# Altium PCB Main.PcbDoc (part 2 of 4)
Units mil, origin at the board's own origin, x right, y up, seen from the top; angles counter-clockwise.
Board outline 16000 x 4900 mil, 4 copper layers (L1-Top, L2-Mid-A, L3-Mid-B, L4-Bottom), stack 285.556 mil thick; 96 components, 105 nets, 278 pads, 8355 vias.
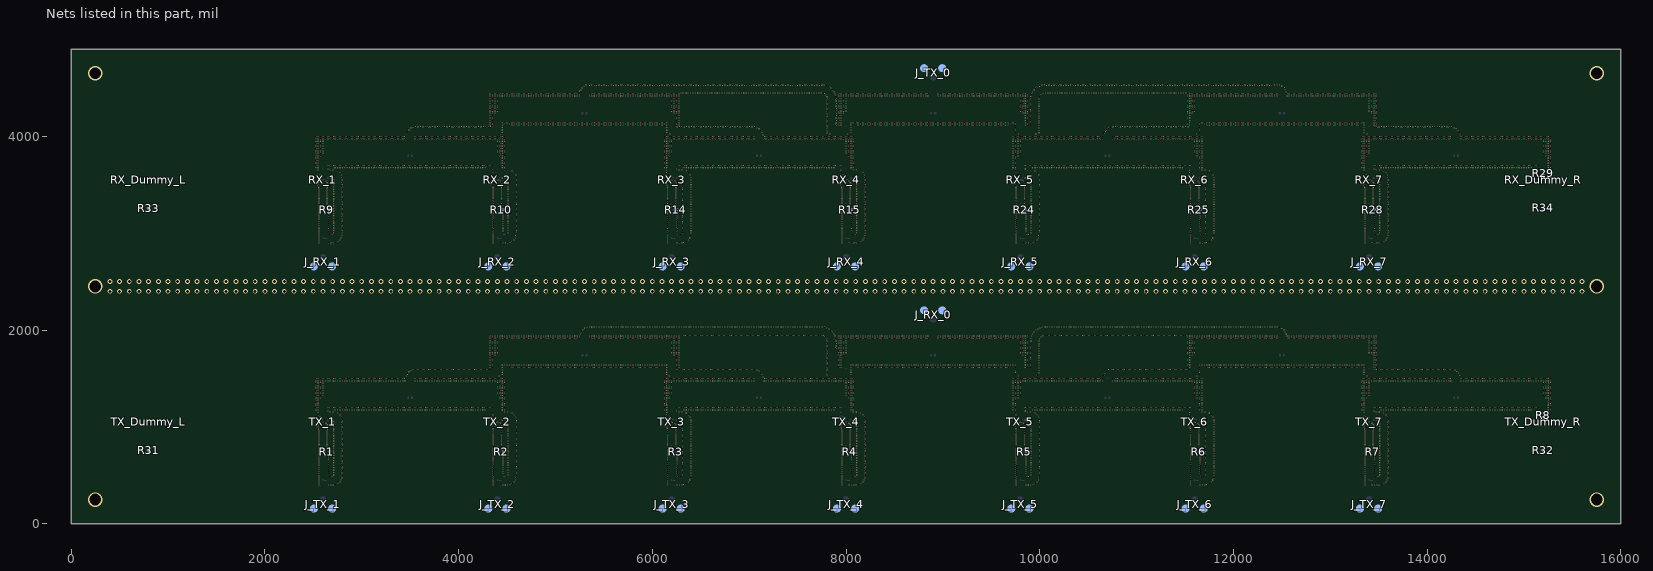
[diagram p4: the nets of this part, all layers, seen from the top]

## Via types
v1: diameter 12, hole 6, L3-Mid-B to L4-Bottom, tented both sides, 5944 vias
v2: diameter 12, hole 6, L3-Mid-B to L4-Bottom, tented bottom, 2081 vias
v3: diameter 50, hole 31, L1-Top to L4-Bottom, tented both sides, 306 vias
v4: diameter 39.37/55.12/55.12 (per signal layer), hole 35.43, L2-Mid-A to L4-Bottom, 18 vias
v5: diameter 150, hole 120, L1-Top to L4-Bottom, 6 vias

## Nets (pads, with @x,y where several pads share a name; then routed paths per layer and width w, separated by ;. In a path a pad name is that pad's centre, name@x,y a point inside that pad or via, vN(x,y) a via of type N, cw(c..) or ccw(c..) an arc to the next point about the centre after c; other vN are vias at no path point) (continued)
GND: (continued)
  other v1: 2558,400 4358,400 6158,400 7958,400 9758,400 11558,400 13358,400 2558,420 4358,420 6158,420 7958,420 9758,420 11558,420 13358,420 2558,440 4358,440 6158,440 7958,440 9758,440 11558,440 13358,440 2558,460 4358,460 6158,460 7958,460 9758,460 11558,460 13358,460 2558,480 4358,480 6158,480 7958,480 9758,480 11558,480 13358,480 2558,500 4358,500 6158,500 7958,500 9758,500 11558,500 13358,500 2558,520 2657.76,520 4358,520 4457.76,520 6158,520 6257.76,520 7958,520 8057.76,520 9758,520 9857.76,520 11558,520 11657.76,520 13358,520 13457.76,520 2558,540 2657.76,540 4358,540 4457.76,540 6158,540 6257.76,540 7958,540 8057.76,540 9758,540 9857.76,540 11558,540 11657.76,540 13358,540 13457.76,540 2558,560 2657.76,560 4358,560 4457.76,560 6158,560 6257.76,560 7958,560 8057.76,560 9758,560 9857.76,560 11558,560 11657.76,560 13358,560 13457.76,560 2558,580 2657.76,580 4358,580 4457.76,580 6158,580 6257.76,580 7958,580 8057.76,580 9758,580 9857.76,580 11558,580 11657.76,580 13358,580 13457.76,580 2558,600 2657.76,600 4358,600 4457.76,600 6158,600 6257.76,600 7958,600 8057.76,600 9758,600 9857.76,600 11558,600 11657.76,600 13358,600 13457.76,600 2558,620 2657.76,620 4358,620 4457.76,620 6158,620 6257.76,620 7958,620 8057.76,620 9758,620 9857.76,620 11558,620 11657.76,620 13358,620 13457.76,620 2558,640 2657.76,640 4358,640 4457.76,640 6158,640 6257.76,640 7958,640 8057.76,640 9758,640 9857.76,640 11558,640 11657.76,640 13358,640 13457.76,640 2558,660 2657.76,660 4358,660 4457.76,660 6158,660 6257.76,660 7958,660 8057.76,660 9758,660 9857.76,660 11558,660 11657.76,660 13358,660 13457.76,660 2558,680 2657.76,680 4358,680 4457.76,680 6158,680 6257.76,680 7958,680 8057.76,680 9758,680 9857.76,680 11558,680 11657.76,680 13358,680 13457.76,680 2558,700 2657.76,700 4358,700 4457.76,700 6158,700 6257.76,700 7958,700 8057.76,700 9758,700 9857.76,700 11558,700 11657.76,700 13358,700 13457.76,700 2558,720 2657.76,720 4358,720 4457.76,720 6158,720 6257.76,720 7958,720 8057.76,720 9758,720 9857.76,720 11558,720 11657.76,720 13358,720 13457.76,720 2558,740 4358,740 6158,740 7958,740 9758,740 11558,740 13358,740 2660.28,742.2 4460.27,742.2 6260.27,742.2 8060.27,742.2 9860.27,742.2 11660.27,742.2 13460.27,742.2 2558,760 4358,760 6158,760 7958,760 9758,760 11558,760 13358,760 2642,775 4442,775 6242,775 8042,775 11642,775 13442,775 2558,780 4358,780 6158,780 7958,780 9758,780 11558,780 13358,780 2642,795 4442,795 6242,795 8042,795 11642,795 13442,795 2558,815 2642,815 4358,815 4442,815 6158,815 6242,815 7958,815 8042,815 9758,815 9842,815 11558,815 11642,815 13358,815 13442,815 2558,835 2642,835 4358,835 4442,835 6158,835 6242,835 7958,835 8042,835 9758,835 9842,835 11558,835 11642,835 13358,835 13442,835 2558,855 2642,855 4358,855 4442,855 6158,855 6242,855 7958,855 8042,855 9758,855 9842,855 11558,855 11642,855 13358,855 13442,855 2558,875 2642,875 4358,875 4442,875 6158,875 6242,875 7958,875 8042,875 9758,875 9842,875 11558,875 11642,875 13358,875 13442,875 2558,895 2642,895 4358,895 4442,895 6158,895 6242,895 7958,895 8042,895 9758,895 9842,895 11558,895 11642,895 13358,895 13442,895 2558,915 2642,915 4358,915 4442,915 6158,915 6242,915 7958,915 8042,915 9758,915 9842,915 11558,915 11642,915 13358,915 13442,915 2558,935 2642,935 4358,935 4442,935 6158,935 6242,935 7958,935 8042,935 9758,935 9842,935 11558,935 11642,935 13358,935 13442,935 2558,955 2642,955 4358,955 4442,955 6158,955 6242,955 7958,955 8042,955 9758,955 9842,955 11558,955 11642,955 13358,955 13442,955 2556.7,975 2643.3,975 4356.7,975 4443.3,975 6156.7,975 6243.3,975 7956.7,975 8043.3,975 9756.7,975 9843.3,975 11556.7,975 11643.3,975 13356.7,975 13443.3,975 2550.76,991.32 2649.24,991.32 4350.76,991.32 4449.24,991.32 6150.76,991.32 6249.24,991.32 7950.76,991.32 8049.24,991.32 9750.76,991.32 9849.24,991.32 11550.76,991.32 11649.24,991.32 13350.76,991.32 13449.24,991.32 2550.76,1008.68 2649.24,1008.68 4350.76,1008.68 4449.24,1008.68 6150.76,1008.68 6249.24,1008.68 7950.76,1008.68 8049.24,1008.68 9750.76,1008.68 9849.24,1008.68 11550.76,1008.68 11649.24,1008.68 13350.76,1008.68 13449.24,1008.68 2556.7,1025 2643.3,1025 4356.7,1025 4443.3,1025 6156.7,1025 6243.3,1025 7956.7,1025 8043.3,1025 9756.7,1025 9843.3,1025 11556.7,1025 11643.3,1025 13356.7,1025 13443.3,1025 2567.86,1038.3 2632.14,1038.3 4367.86,1038.3 4432.14,1038.3 6167.86,1038.3 6232.14,1038.3 7967.86,1038.3 8032.14,1038.3 9767.86,1038.3 9832.14,1038.3 11567.86,1038.3 11632.14,1038.3 13367.86,1038.3 13432.14,1038.3 2582.9,1046.98 2617.1,1046.98 4382.9,1046.98 4417.1,1046.98 6182.9,1046.98 6217.1,1046.98 7982.9,1046.98 8017.1,1046.98 9782.9,1046.98 9817.1,1046.98 11582.9,1046.98 11617.1,1046.98 13382.9,1046.98 13417.1,1046.98 2600,1050 4400,1050 6200,1050 8000,1050 9800,1050 11600,1050 13400,1050 2525,1175 2550,1175 2725,1175 2750,1175 2775,1175 2800,1175 2825,1175 2850,1175 2875,1175 2900,1175 2925,1175 2950,1175 2975,1175 3000,1175 3025,1175 3050,1175 3075,1175 3100,1175 3125,1175 3150,1175 3175,1175 3200,1175 3225,1175 3250,1175 3275,1175 3300,1175 3325,1175 3350,1175 3375,1175 3400,1175 3425,1175 3450,1175 3475,1175 3500,1175 3525,1175 3550,1175 3575,1175 3600,1175 3625,1175 3650,1175 3675,1175 3700,1175 3725,1175 3750,1175 3775,1175 3800,1175 3825,1175 3850,1175 3875,1175 3900,1175 3925,1175 3950,1175 3975,1175 4000,1175 4025,1175 4050,1175 4075,1175 4100,1175 4125,1175 4150,1175 4175,1175 4200,1175 4225,1175 4250,1175 4275,1175 4450,1175 4475,1175 6125,1175 6150,1175 6325,1175 6350,1175 6375,1175 6400,1175 6425,1175 6450,1175 6475,1175 6500,1175 6525,1175 6550,1175 6575,1175 6600,1175 6625,1175 6650,1175 6675,1175 6700,1175 6725,1175 6750,1175 6775,1175 6800,1175 6825,1175 6850,1175 6875,1175 6900,1175 6925,1175 6950,1175 6975,1175 7000,1175 7025,1175 7050,1175 7075,1175 7100,1175 7125,1175 7150,1175 7175,1175 7200,1175 7225,1175 7250,1175 7275,1175 7300,1175 7325,1175 7350,1175 7375,1175 7400,1175 7425,1175 7450,1175 7475,1175 7500,1175 7525,1175 7550,1175 7575,1175 7600,1175 7625,1175 7650,1175 7675,1175 7700,1175 7725,1175 7750,1175 7775,1175 7800,1175 7825,1175 7850,1175 7875,1175 8050,1175 8075,1175 9725,1175 9750,1175 9925,1175 9950,1175 9975,1175 10000,1175 10025,1175 10050,1175 10075,1175 10100,1175 10125,1175 10150,1175 10175,1175 10200,1175 10225,1175 10250,1175 10275,1175 10300,1175 10325,1175 10350,1175 10375,1175 10400,1175 10425,1175 10450,1175 10475,1175 10500,1175 10525,1175 10550,1175 10575,1175 10600,1175 10625,1175 10650,1175 10675,1175 10700,1175 10725,1175 10750,1175 10775,1175 10800,1175 10825,1175 10850,1175 10875,1175 10900,1175 10925,1175 10950,1175 10975,1175 11000,1175 11025,1175 11050,1175 11075,1175 11100,1175 11125,1175 11150,1175 11175,1175 11200,1175 11225,1175 11250,1175 11275,1175 11300,1175 11325,1175 11350,1175 11375,1175 11400,1175 11425,1175 11450,1175 11475,1175 11650,1175 11675,1175 13325,1175 13350,1175 13525,1175 13550,1175 13575,1175 13600,1175 13625,1175 13650,1175 13675,1175 13700,1175 13725,1175 13750,1175 13775,1175 13800,1175 13825,1175 13850,1175 13875,1175 13900,1175 13925,1175 13950,1175 13975,1175 14000,1175 14025,1175 14050,1175 14075,1175 14100,1175 14125,1175 14150,1175 14175,1175 14200,1175 14225,1175 14250,1175 14275,1175 14300,1175 14325,1175 14350,1175 14375,1175 14400,1175 14425,1175 14450,1175 14475,1175 14500,1175 14525,1175 14550,1175 14575,1175 14600,1175 14625,1175 14650,1175 14675,1175 14700,1175 14725,1175 14750,1175 14775,1175 14800,1175 14825,1175 14850,1175 14875,1175 14900,1175 14925,1175 14950,1175 14975,1175 15000,1175 15025,1175 15050,1175 15075,1175 15250,1175 15275,1175 2525,1200 2550,1200 2650,1200 2675,1200 2700,1200 2725,1200 2750,1200 2775,1200 2800,1200 2825,1200 2850,1200 2875,1200 2900,1200 2925,1200 2950,1200 2975,1200 3000,1200 3025,1200 3050,1200 3075,1200 3100,1200 3125,1200 3150,1200 3175,1200 3200,1200 3225,1200 3250,1200 3275,1200 3300,1200 3325,1200 3350,1200 3375,1200 3400,1200 3425,1200 3450,1200 3475,1200 3500,1200 3525,1200 3550,1200 3575,1200 3600,1200 3625,1200 3650,1200 3675,1200 3700,1200 3725,1200 3750,1200 3775,1200 3800,1200 3825,1200 3850,1200 3875,1200 3900,1200 3925,1200 3950,1200 3975,1200 4000,1200 4025,1200 4050,1200 4075,1200 4100,1200 4125,1200 4150,1200 4175,1200 4200,1200 4225,1200 4250,1200 4275,1200 4300,1200 4325,1200 4350,1200 4450,1200 4475,1200 6125,1200 6150,1200 6250,1200 6275,1200 6300,1200 6325,1200 6350,1200 6375,1200 6400,1200 6425,1200 6450,1200 6475,1200 6500,1200 6525,1200 6550,1200 6575,1200 6600,1200 6625,1200 6650,1200 6675,1200 6700,1200 6725,1200 6750,1200 6775,1200 6800,1200 6825,1200 6850,1200 6875,1200 6900,1200 6925,1200 6950,1200 6975,1200 7000,1200 7025,1200 7050,1200 7075,1200 7100,1200 7125,1200 7150,1200 7175,1200 7200,1200 7225,1200 7250,1200 7275,1200 7300,1200 7325,1200 7350,1200 7375,1200 7400,1200 7425,1200 7450,1200 7475,1200 7500,1200 7525,1200 7550,1200 7575,1200 7600,1200 7625,1200 7650,1200 7675,1200 7700,1200 7725,1200 7750,1200 7775,1200 7800,1200 7825,1200 7850,1200 7875,1200 7900,1200 7925,1200 7950,1200 8050,1200 8075,1200 9725,1200 9750,1200 9850,1200 9875,1200 9900,1200 9925,1200 9950,1200 9975,1200 10000,1200 10025,1200 10050,1200 10075,1200 10100,1200 10125,1200 10150,1200 10175,1200 10200,1200 10225,1200 10250,1200 10275,1200 10300,1200 10325,1200 10350,1200 10375,1200 10400,1200 10425,1200 10450,1200 10475,1200 10500,1200 10525,1200 10550,1200 10575,1200 10600,1200 10625,1200 10650,1200 10675,1200 10700,1200 10725,1200 10750,1200 10775,1200 10800,1200 10825,1200 10850,1200 10875,1200 10900,1200 10925,1200 10950,1200 10975,1200 11000,1200 11025,1200 11050,1200 11075,1200 11100,1200 11125,1200 11150,1200 11175,1200 11200,1200 11225,1200 11250,1200 11275,1200 11300,1200 11325,1200 11350,1200 11375,1200 11400,1200 11425,1200 11450,1200 11475,1200 11500,1200 11525,1200 11550,1200 11650,1200 11675,1200 13325,1200 13350,1200 13450,1200 13475,1200 13500,1200 13525,1200 13550,1200 13575,1200 13600,1200 13625,1200 13650,1200 13675,1200 13700,1200 13725,1200 13750,1200 13775,1200 13800,1200 13825,1200 13850,1200 13875,1200 13900,1200 13925,1200 13950,1200 13975,1200 14000,1200 14025,1200 14050,1200 14075,1200 14100,1200 14125,1200 14150,1200 14175,1200 14200,1200 14225,1200 14250,1200 14275,1200 14300,1200 14325,1200 14350,1200 14375,1200 14400,1200 14425,1200 14450,1200 14475,1200 14500,1200 14525,1200 14550,1200 14575,1200 14600,1200 14625,1200 14650,1200 14675,1200 14700,1200 14725,1200 14750,1200 14775,1200 14800,1200 14825,1200 14850,1200 14875,1200 14900,1200 14925,1200 14950,1200 14975,1200 15000,1200 15025,1200 15050,1200 15075,1200 15100,1200 15125,1200 15150,1200 15250,1200 15275,1200 2525,1225 2550,1225 4450,1225 4475,1225 6125,1225 6150,1225 8050,1225 8075,1225 9725,1225 9750,1225 11650,1225 11675,1225 13325,1225 13350,1225 15250,1225 15275,1225 2525,1250 2550,1250 4450,1250 4475,1250 6125,1250 6150,1250 8050,1250 8075,1250 9725,1250 9750,1250 11650,1250 11675,1250 13325,1250 13350,1250 15250,1250 15275,1250 2525,1275 2550,1275 4450,1275 4475,1275 6125,1275 6150,1275 8050,1275 8075,1275 9725,1275 9750,1275 11650,1275 11675,1275 13325,1275 13350,1275 15250,1275 15275,1275 2525,1300 2550,1300 2575,1300 4425,1300 4450,1300 4475,1300 6125,1300 6150,1300 6175,1300 8025,1300 8050,1300 8075,1300 9725,1300 9750,1300 9775,1300 11625,1300 11650,1300 11675,1300 13325,1300 13350,1300 13375,1300 15225,1300 15250,1300 15275,1300 2525,1325 2550,1325 2575,1325 2600,1325 4400,1325 4425,1325 4450,1325 4475,1325 6125,1325 6150,1325 6175,1325 6200,1325 8000,1325 8025,1325 8050,1325 8075,1325 9725,1325 9750,1325 9775,1325 9800,1325 11600,1325 11625,1325 11650,1325 11675,1325 13325,1325 13350,1325 13375,1325 13400,1325 15200,1325 15225,1325 15250,1325 15275,1325 2525,1350 2550,1350 2575,1350 2600,1350 4400,1350 4425,1350 4450,1350 4475,1350 6125,1350 6150,1350 6175,1350 6200,1350 8000,1350 8025,1350 8050,1350 8075,1350 9725,1350 9750,1350 9775,1350 9800,1350 11600,1350 11625,1350 11650,1350 11675,1350 13325,1350 13350,1350 13375,1350 13400,1350 15200,1350 15225,1350 15250,1350 15275,1350 2525,1375 2550,1375 2575,1375 2600,1375 4400,1375 4425,1375 4450,1375 4475,1375 6125,1375 6150,1375 6175,1375 6200,1375 8000,1375 8025,1375 8050,1375 8075,1375 9725,1375 9750,1375 9775,1375 9800,1375 11600,1375 11625,1375 11650,1375 11675,1375 13325,1375 13350,1375 13375,1375 13400,1375 15200,1375 15225,1375 15250,1375 15275,1375 2525,1400 2550,1400 2575,1400 2600,1400 4400,1400 4425,1400 4450,1400 4475,1400 6125,1400 6150,1400 6175,1400 6200,1400 8000,1400 8025,1400 8050,1400 8075,1400 9725,1400 9750,1400 9775,1400 9800,1400 11600,1400 11625,1400 11650,1400 11675,1400 13325,1400 13350,1400 13375,1400 13400,1400 15200,1400 15225,1400 15250,1400 15275,1400 2525,1425 2550,1425 2575,1425 2600,1425 4400,1425 4425,1425 4450,1425 4475,1425 6125,1425 6150,1425 6175,1425 6200,1425 8000,1425 8025,1425 8050,1425 8075,1425 9725,1425 9750,1425 9775,1425 9800,1425 11600,1425 11625,1425 11650,1425 11675,1425 13325,1425 13350,1425 13375,1425 13400,1425 15200,1425 15225,1425 15250,1425 15275,1425 2525,1450 2550,1450 2575,1450 2600,1450 4400,1450 4425,1450 4450,1450 4475,1450 6125,1450 6150,1450 6175,1450 6200,1450 8000,1450 8025,1450 8050,1450 8075,1450 9725,1450 9750,1450 9775,1450 9800,1450 11600,1450 11625,1450 11650,1450 11675,1450 13325,1450 13350,1450 13375,1450 13400,1450 15200,1450 15225,1450 15250,1450 15275,1450 2525,1475 2550,1475 2575,1475 2600,1475 2625,1475 2650,1475 2675,1475 2700,1475 2725,1475 2750,1475 2775,1475 2800,1475 2825,1475 2850,1475 2875,1475 2900,1475 2925,1475 2950,1475 2975,1475 3000,1475 3025,1475 3050,1475 3075,1475 3100,1475 3125,1475 3150,1475 3175,1475 3200,1475 3225,1475 3250,1475 3275,1475 3300,1475 3325,1475 3350,1475 3375,1475 3400,1475 3425,1475 3450,1475 3550,1475 3575,1475 3600,1475 3625,1475 3650,1475 3675,1475 3700,1475 3725,1475 3750,1475 3775,1475 3800,1475 3825,1475 3850,1475 3875,1475 3900,1475 3925,1475 3950,1475 3975,1475 4000,1475 4025,1475 4050,1475 4075,1475 4100,1475 4125,1475 4150,1475 4175,1475 4200,1475 4225,1475 4250,1475 4275,1475 4300,1475 4325,1475 4350,1475 4375,1475 4400,1475 4425,1475 4450,1475 4475,1475 6125,1475 6150,1475 6175,1475 6200,1475 6225,1475 6250,1475 6275,1475 6300,1475 6325,1475 6350,1475 6375,1475 6400,1475 6425,1475 6450,1475 6475,1475 6500,1475 6525,1475 6550,1475 6575,1475 6600,1475 6625,1475 6650,1475 6675,1475 6700,1475 6725,1475 6750,1475 6775,1475 6800,1475 6825,1475 6850,1475 6875,1475 6900,1475 6925,1475 6950,1475 6975,1475 7000,1475 7025,1475 7050,1475 7150,1475 7175,1475 7200,1475 7225,1475 7250,1475 7275,1475 7300,1475 7325,1475 7350,1475 7375,1475 7400,1475 7425,1475 7450,1475 7475,1475 7500,1475 7525,1475 7550,1475 7575,1475 7600,1475 7625,1475 7650,1475 7675,1475 7700,1475 7725,1475 7750,1475 7775,1475 7800,1475 7825,1475 7850,1475 7875,1475 7900,1475 7925,1475 7950,1475 7975,1475 8000,1475 8025,1475 8050,1475 8075,1475 9725,1475 9750,1475 9775,1475 9800,1475 9825,1475 9850,1475 9875,1475 9900,1475 9925,1475 9950,1475 9975,1475 10000,1475 10025,1475 10050,1475 10075,1475 10100,1475 10125,1475 10150,1475 10175,1475 10200,1475 10225,1475 10250,1475 10275,1475 10300,1475 10325,1475 10350,1475 10375,1475 10400,1475 10425,1475 10450,1475 10475,1475 10500,1475 10525,1475 10550,1475 10575,1475 10600,1475 10625,1475 10650,1475 10750,1475 10775,1475 10800,1475 10825,1475 10850,1475 10875,1475 10900,1475 10925,1475 10950,1475 10975,1475 11000,1475 11025,1475 11050,1475 11075,1475 11100,1475 11125,1475 11150,1475 11175,1475 11200,1475 11225,1475 11250,1475 11275,1475 11300,1475 11325,1475 11350,1475 11375,1475 11400,1475 11425,1475 11450,1475 11475,1475 11500,1475 11525,1475 11550,1475 11575,1475 11600,1475 11625,1475 11650,1475 11675,1475 13325,1475 13350,1475 13375,1475 13400,1475 13425,1475 13450,1475 13475,1475 13500,1475 13525,1475 13550,1475 13575,1475 13600,1475 13625,1475 13650,1475 13675,1475 13700,1475 13725,1475 13750,1475 13775,1475 13800,1475 13825,1475 13850,1475 13875,1475 13900,1475 13925,1475 13950,1475 13975,1475 14000,1475 14025,1475 14050,1475 14075,1475 14100,1475 14125,1475 14150,1475 14175,1475 14200,1475 14225,1475 14250,1475 14350,1475 14375,1475 14400,1475 14425,1475 14450,1475 14475,1475 14500,1475 14525,1475 14550,1475 14575,1475 14600,1475 14625,1475 14650,1475 14675,1475 14700,1475 14725,1475 14750,1475 14775,1475 14800,1475 14825,1475 14850,1475 14875,1475 14900,1475 14925,1475 14950,1475 14975,1475 15000,1475 15025,1475 15050,1475 15075,1475 15100,1475 15125,1475 15150,1475 15175,1475 15200,1475 15225,1475 15250,1475 15275,1475 2525,1500 2550,1500 2575,1500 2600,1500 2625,1500 2650,1500 2675,1500 2700,1500 2725,1500 2750,1500 2775,1500 2800,1500 2825,1500 2850,1500 2875,1500 2900,1500 2925,1500 2950,1500 2975,1500 3000,1500 3025,1500 3050,1500 3075,1500 3100,1500 3125,1500 3150,1500 3175,1500 3200,1500 3225,1500 3250,1500 3275,1500 3300,1500 3325,1500 3350,1500 3375,1500 3400,1500 3425,1500 3450,1500 3550,1500 3575,1500 3600,1500 3625,1500 3650,1500 3675,1500 3700,1500 3725,1500 3750,1500 3775,1500 3800,1500 3825,1500 3850,1500 3875,1500 3900,1500 3925,1500 3950,1500 3975,1500 4000,1500 4025,1500 4050,1500 4075,1500 4100,1500 4125,1500 4150,1500 4175,1500 4200,1500 4225,1500 4250,1500 4275,1500 4300,1500 4325,1500 4350,1500 4375,1500 4400,1500 4425,1500 4450,1500 4475,1500 6125,1500 6150,1500 6175,1500 6200,1500 6225,1500 6250,1500 6275,1500 6300,1500 6325,1500 6350,1500 6375,1500 6400,1500 6425,1500 6450,1500 6475,1500 6500,1500 6525,1500 6550,1500 6575,1500 6600,1500 6625,1500 6650,1500 6675,1500 6700,1500 6725,1500 6750,1500 6775,1500 6800,1500 6825,1500 6850,1500 6875,1500 6900,1500 6925,1500 6950,1500 6975,1500 7000,1500 7025,1500 7050,1500 7150,1500 7175,1500 7200,1500 7225,1500 7250,1500 7275,1500 7300,1500 7325,1500 7350,1500 7375,1500 7400,1500 7425,1500 7450,1500 7475,1500 7500,1500 7525,1500 7550,1500 7575,1500 7600,1500 7625,1500 7650,1500 7675,1500 7700,1500 7725,1500 7750,1500 7775,1500 7800,1500 7825,1500 7850,1500 7875,1500 7900,1500 7925,1500 7950,1500 7975,1500 8000,1500 8025,1500 8050,1500 8075,1500 9725,1500 9750,1500 9775,1500 9800,1500 9825,1500 9850,1500 9875,1500 9900,1500 9925,1500 9950,1500 9975,1500 10000,1500 10025,1500 10050,1500 10075,1500 10100,1500 10125,1500 10150,1500 10175,1500 10200,1500 10225,1500 10250,1500 10275,1500 10300,1500 10325,1500 10350,1500 10375,1500 10400,1500 10425,1500 10450,1500 10475,1500 10500,1500 10525,1500 10550,1500 10575,1500 10600,1500 10625,1500 10650,1500 10750,1500 10775,1500 10800,1500 10825,1500 10850,1500 10875,1500 10900,1500 10925,1500 10950,1500 10975,1500 11000,1500 11025,1500 11050,1500 11075,1500 11100,1500 11125,1500 11150,1500 11175,1500 11200,1500 11225,1500 11250,1500 11275,1500 11300,1500 11325,1500 11350,1500 11375,1500 11400,1500 11425,1500 11450,1500 11475,1500 11500,1500 11525,1500 11550,1500 11575,1500 11600,1500 11625,1500 11650,1500 11675,1500 13325,1500 13350,1500 13375,1500 13400,1500 13425,1500 13450,1500 13475,1500 13500,1500 13525,1500 13550,1500 13575,1500 13600,1500 13625,1500 13650,1500 13675,1500 13700,1500 13725,1500 13750,1500 13775,1500 13800,1500 13825,1500 13850,1500 13875,1500 13900,1500 13925,1500 13950,1500 13975,1500 14000,1500 14025,1500 14050,1500 14075,1500 14100,1500 14125,1500 14150,1500 14175,1500 14200,1500 14225,1500 14250,1500 14350,1500 14375,1500 14400,1500 14425,1500 14450,1500 14475,1500 14500,1500 14525,1500 14550,1500 14575,1500 14600,1500 14625,1500 14650,1500 14675,1500 14700,1500 14725,1500 14750,1500 14775,1500 14800,1500 14825,1500 14850,1500 14875,1500 14900,1500 14925,1500 14950,1500 14975,1500 15000,1500 15025,1500 15050,1500 15075,1500 15100,1500 15125,1500 15150,1500 15175,1500 15200,1500 15225,1500 15250,1500 15275,1500 4420,1525 6175,1525 11625,1525 13380,1525 4450,1540 6150,1540 11650,1540 13350,1540 4450,1565 6150,1565 11650,1565 13350,1565 4450,1590 6150,1590 11650,1590 13350,1590 4325,1615 4350,1615 4450,1615 4525,1615 4550,1615 4575,1615 4600,1615 4625,1615 4650,1615 4675,1615 4700,1615 4725,1615 4750,1615 4775,1615 4800,1615 4825,1615 4850,1615 4875,1615 4900,1615 4925,1615 4950,1615 4975,1615 5000,1615 5025,1615 5050,1615 5075,1615 5100,1615 5125,1615 5150,1615 5175,1615 5200,1615 5225,1615 5250,1615 5275,1615 5300,1615 5325,1615 5350,1615 5375,1615 5400,1615 5425,1615 5450,1615 5475,1615 5500,1615 5525,1615 5550,1615 5575,1615 5600,1615 5625,1615 5650,1615 5675,1615 5700,1615 5725,1615 5750,1615 5775,1615 5800,1615 5825,1615 5850,1615 5875,1615 5900,1615 5925,1615 5950,1615 5975,1615 6000,1615 6025,1615 6050,1615 6075,1615 6150,1615 6250,1615 6275,1615 7925,1615 7950,1615 8125,1615 8150,1615 8175,1615 8200,1615 8225,1615 8250,1615 8275,1615 8300,1615 8325,1615 8350,1615 8375,1615 8400,1615 8425,1615 8450,1615 8475,1615 8500,1615 8525,1615 8550,1615 8575,1615 8600,1615 8625,1615 8650,1615 8675,1615 8700,1615 8725,1615 8750,1615 8775,1615 8800,1615 8825,1615 8850,1615 8875,1615 8900,1615 8925,1615 8950,1615 8975,1615 9000,1615 9025,1615 9050,1615 9075,1615 9100,1615 9125,1615 9150,1615 9175,1615 9200,1615 9225,1615 9250,1615 9275,1615 9300,1615 9325,1615 9350,1615 9375,1615 9400,1615 9425,1615 9450,1615 9475,1615 9500,1615 9525,1615 9550,1615 9575,1615 9600,1615 9625,1615 9650,1615 9675,1615 9850,1615 9875,1615 11525,1615 11550,1615 11650,1615 11725,1615 11750,1615 11775,1615 11800,1615 11825,1615 11850,1615 11875,1615 11900,1615 11925,1615 11950,1615 11975,1615 12000,1615 12025,1615 12050,1615 12075,1615 12100,1615 12125,1615 12150,1615 12175,1615 12200,1615 12225,1615 12250,1615 12275,1615 12300,1615 12325,1615 12350,1615 12375,1615 12400,1615 12425,1615 12450,1615 12475,1615 12500,1615 12525,1615 12550,1615 12575,1615 12600,1615 12625,1615 12650,1615 12675,1615 12700,1615 12725,1615 12750,1615 12775,1615 12800,1615 12825,1615 12850,1615 12875,1615 12900,1615 12925,1615 12950,1615 12975,1615 13000,1615 13025,1615 13050,1615 13075,1615 13100,1615 13125,1615 13150,1615 13175,1615 13200,1615 13225,1615 13250,1615 13275,1615 13350,1615 13450,1615 13475,1615 4325,1640 4350,1640 4450,1640 4475,1640 4500,1640 4525,1640 4550,1640 4575,1640 4600,1640 4625,1640 4650,1640 4675,1640 4700,1640 4725,1640 4750,1640 4775,1640 4800,1640 4825,1640 4850,1640 4875,1640 4900,1640 4925,1640 4950,1640 4975,1640 5000,1640 5025,1640 5050,1640 5075,1640 5100,1640 5125,1640 5150,1640 5175,1640 5200,1640 5225,1640 5250,1640 5275,1640 5300,1640 5325,1640 5350,1640 5375,1640 5400,1640 5425,1640 5450,1640 5475,1640 5500,1640 5525,1640 5550,1640 5575,1640 5600,1640 5625,1640 5650,1640 5675,1640 5700,1640 5725,1640 5750,1640 5775,1640 5800,1640 5825,1640 5850,1640 5875,1640 5900,1640 5925,1640 5950,1640 5975,1640 6000,1640 6025,1640 6050,1640 6075,1640 6100,1640 6125,1640 6150,1640 6250,1640 6275,1640 7925,1640 7950,1640 8050,1640 8075,1640 8100,1640 8125,1640 8150,1640 8175,1640 8200,1640 8225,1640 8250,1640 8275,1640 8300,1640 8325,1640 8350,1640 8375,1640 8400,1640 8425,1640 8450,1640 8475,1640 8500,1640 8525,1640 8550,1640 8575,1640 8600,1640 8625,1640 8650,1640 8675,1640 8700,1640 8725,1640 8750,1640 8775,1640 8800,1640 8825,1640 8850,1640 8875,1640 8900,1640 8925,1640 8950,1640 8975,1640 9000,1640 9025,1640 9050,1640 9075,1640 9100,1640 9125,1640 9150,1640 9175,1640 9200,1640 9225,1640 9250,1640 9275,1640 9300,1640 9325,1640 9350,1640 9375,1640 9400,1640 9425,1640 9450,1640 9475,1640 9500,1640 9525,1640 9550,1640 9575,1640 9600,1640 9625,1640 9650,1640 9675,1640 9700,1640 9725,1640 9750,1640 9850,1640 9875,1640 11525,1640 11550,1640 11650,1640 11675,1640 11700,1640 11725,1640 11750,1640 11775,1640 11800,1640 11825,1640 11850,1640 11875,1640 11900,1640 11925,1640 11950,1640 11975,1640 12000,1640 12025,1640 12050,1640 12075,1640 12100,1640 12125,1640 12150,1640 12175,1640 12200,1640 12225,1640 12250,1640 12275,1640 12300,1640 12325,1640 12350,1640 12375,1640 12400,1640 12425,1640 12450,1640 12475,1640 12500,1640 12525,1640 12550,1640 12575,1640 12600,1640 12625,1640 12650,1640 12675,1640 12700,1640 12725,1640 12750,1640 12775,1640 12800,1640 12825,1640 12850,1640 12875,1640 12900,1640 12925,1640 12950,1640 12975,1640 13000,1640 13025,1640 13050,1640 13075,1640 13100,1640 13125,1640 13150,1640 13175,1640 13200,1640 13225,1640 13250,1640 13275,1640 13300,1640 13325,1640 13350,1640 13450,1640 13475,1640 4325,1665 4350,1665 6250,1665 6275,1665 7925,1665 7950,1665 9850,1665 9875,1665 11525,1665 11550,1665 13450,1665 13475,1665 4325,1690 4350,1690 6250,1690 6275,1690 7925,1690 7950,1690 9850,1690 9875,1690 11525,1690 11550,1690 13450,1690 13475,1690 4325,1715 4350,1715 6250,1715 6275,1715 7925,1715 7950,1715 9850,1715 9875,1715 11525,1715 11550,1715 13450,1715 13475,1715 4325,1740 4350,1740 4375,1740 6225,1740 6250,1740 6275,1740 7925,1740 7950,1740 7975,1740 9825,1740 9850,1740 9875,1740 11525,1740 11550,1740 11575,1740 13425,1740 13450,1740 13475,1740 4325,1765 4350,1765 4375,1765 4400,1765 6200,1765 6225,1765 6250,1765 6275,1765 7925,1765 7950,1765 7975,1765 8000,1765 9800,1765 9825,1765 9850,1765 9875,1765 11525,1765 11550,1765 11575,1765 11600,1765 13400,1765 13425,1765 13450,1765 13475,1765 4325,1790 4350,1790 4375,1790 4400,1790 6200,1790 6225,1790 6250,1790 6275,1790 7925,1790 7950,1790 7975,1790 8000,1790 9800,1790 9825,1790 9850,1790 9875,1790 11525,1790 11550,1790 11575,1790 11600,1790 13400,1790 13425,1790 13450,1790 13475,1790 4325,1815 4350,1815 4375,1815 4400,1815 6200,1815 6225,1815 6250,1815 6275,1815 7925,1815 7950,1815 7975,1815 8000,1815 9800,1815 9825,1815 9850,1815 9875,1815 11525,1815 11550,1815 11575,1815 11600,1815 13400,1815 13425,1815 13450,1815 13475,1815 4325,1840 4350,1840 4375,1840 4400,1840 6200,1840 6225,1840 6250,1840 6275,1840 7925,1840 7950,1840 7975,1840 8000,1840 9800,1840 9825,1840 9850,1840 9875,1840 11525,1840 11550,1840 11575,1840 11600,1840 13400,1840 13425,1840 13450,1840 13475,1840 4325,1865 4350,1865 4375,1865 4400,1865 6200,1865 6225,1865 6250,1865 6275,1865 7925,1865 7950,1865 7975,1865 8000,1865 9800,1865 9825,1865 9850,1865 9875,1865 11525,1865 11550,1865 11575,1865 11600,1865 13400,1865 13425,1865 13450,1865 13475,1865 4325,1890 4350,1890 4375,1890 4400,1890 6200,1890 6225,1890 6250,1890 6275,1890 7925,1890 7950,1890 7975,1890 8000,1890 9800,1890 9825,1890 9850,1890 9875,1890 11525,1890 11550,1890 11575,1890 11600,1890 13400,1890 13425,1890 13450,1890 13475,1890 4325,1915 4350,1915 4375,1915 4400,1915 4425,1915 4450,1915 4475,1915 4500,1915 4525,1915 4550,1915 4575,1915 4600,1915 4625,1915 4650,1915 4675,1915 4700,1915 4725,1915 4750,1915 4775,1915 4800,1915 4825,1915 4850,1915 4875,1915 4900,1915 4925,1915 4950,1915 4975,1915 5000,1915 5025,1915 5050,1915 5075,1915 5100,1915 5125,1915 5150,1915 5175,1915 5200,1915 5225,1915 5250,1915 5350,1915 5375,1915 5400,1915 5425,1915 5450,1915 5475,1915 5500,1915 5525,1915 5550,1915 5575,1915 5600,1915 5625,1915 5650,1915 5675,1915 5700,1915 5725,1915 5750,1915 5775,1915 5800,1915 5825,1915 5850,1915 5875,1915 5900,1915 5925,1915 5950,1915 5975,1915 6000,1915 6025,1915 6050,1915 6075,1915 6100,1915 6125,1915 6150,1915 6175,1915 6200,1915 6225,1915 6250,1915 6275,1915 7925,1915 7950,1915 7975,1915 8000,1915 8025,1915 8050,1915 8075,1915 8100,1915 8125,1915 8150,1915 8175,1915 8200,1915 8225,1915 8250,1915 8275,1915 8300,1915 8325,1915 8350,1915 8375,1915 8400,1915 8425,1915 8450,1915 8475,1915 8500,1915 8525,1915 8550,1915 8575,1915 8600,1915 8625,1915 8650,1915 8675,1915 8700,1915 8725,1915 8750,1915 8775,1915 8800,1915 8825,1915 8850,1915 8950,1915 8975,1915 9000,1915 9025,1915 9050,1915 9075,1915 9100,1915 9125,1915 9150,1915 9175,1915 9200,1915 9225,1915 9250,1915 9275,1915 9300,1915 9325,1915 9350,1915 9375,1915 9400,1915 9425,1915 9450,1915 9475,1915 9500,1915 9525,1915 9550,1915 9575,1915 9600,1915 9625,1915 9650,1915 9675,1915 9700,1915 9725,1915 9750,1915 9775,1915 9800,1915 9825,1915 9850,1915 9875,1915 11525,1915 11550,1915 11575,1915 11600,1915 11625,1915 11650,1915 11675,1915 11700,1915 11725,1915 11750,1915 11775,1915 11800,1915 11825,1915 11850,1915 11875,1915 11900,1915 11925,1915 11950,1915 11975,1915 12000,1915 12025,1915 12050,1915 12075,1915 12100,1915 12125,1915 12150,1915 12175,1915 12200,1915 12225,1915 12250,1915 12275,1915 12300,1915 12325,1915 12350,1915 12375,1915 12400,1915 12425,1915 12450,1915 12550,1915 12575,1915 12600,1915 12625,1915 12650,1915 12675,1915 12700,1915 12725,1915 12750,1915 12775,1915 12800,1915 12825,1915 12850,1915 12875,1915 12900,1915 12925,1915 12950,1915 12975,1915 13000,1915 13025,1915 13050,1915 13075,1915 13100,1915 13125,1915 13150,1915 13175,1915 13200,1915 13225,1915 13250,1915 13275,1915 13300,1915 13325,1915 13350,1915 13375,1915 13400,1915 13425,1915 13450,1915 13475,1915 4325,1940 4350,1940 4375,1940 4400,1940 4425,1940 4450,1940 4475,1940 4500,1940 4525,1940 4550,1940 4575,1940 4600,1940 4625,1940 4650,1940 4675,1940 4700,1940 4725,1940 4750,1940 4775,1940 4800,1940 4825,1940 4850,1940 4875,1940 4900,1940 4925,1940 4950,1940 4975,1940 5000,1940 5025,1940 5050,1940 5075,1940 5100,1940 5125,1940 5150,1940 5175,1940 5200,1940 5225,1940 5250,1940 5350,1940 5375,1940 5400,1940 5425,1940 5450,1940 5475,1940 5500,1940 5525,1940 5550,1940 5575,1940 5600,1940 5625,1940 5650,1940 5675,1940 5700,1940 5725,1940 5750,1940 5775,1940 5800,1940 5825,1940 5850,1940 5875,1940 5900,1940 5925,1940 5950,1940 5975,1940 6000,1940 6025,1940 6050,1940 6075,1940 6100,1940 6125,1940 6150,1940 6175,1940 6200,1940 6225,1940 6250,1940 6275,1940 7925,1940 7950,1940 7975,1940 8000,1940 8025,1940 8050,1940 8075,1940 8100,1940 8125,1940 8150,1940 8175,1940 8200,1940 8225,1940 8250,1940 8275,1940 8300,1940 8325,1940 8350,1940 8375,1940 8400,1940 8425,1940 8450,1940 8475,1940 8500,1940 8525,1940 8550,1940 8575,1940 8600,1940 8625,1940 8650,1940 8675,1940 8700,1940 8725,1940 8750,1940 8775,1940 8800,1940 8825,1940 8850,1940 8950,1940 8975,1940 9000,1940 9025,1940 9050,1940 9075,1940 9100,1940 9125,1940 9150,1940 9175,1940 9200,1940 9225,1940 9250,1940 9275,1940 9300,1940 9325,1940 9350,1940 9375,1940 9400,1940 9425,1940 9450,1940 9475,1940 9500,1940 9525,1940 9550,1940 9575,1940 9600,1940 9625,1940 9650,1940 9675,1940 9700,1940 9725,1940 9750,1940 9775,1940 9800,1940 9825,1940 9850,1940 9875,1940 11525,1940 11550,1940 11575,1940 11600,1940 11625,1940 11650,1940 11675,1940 11700,1940 11725,1940 11750,1940 11775,1940 11800,1940 11825,1940 11850,1940 11875,1940 11900,1940 11925,1940 11950,1940 11975,1940 12000,1940 12025,1940 12050,1940 12075,1940 12100,1940 12125,1940 12150,1940 12175,1940 12200,1940 12225,1940 12250,1940 12275,1940 12300,1940 12325,1940 12350,1940 12375,1940 12400,1940 12425,1940 12450,1940 12550,1940 12575,1940 12600,1940 12625,1940 12650,1940 12675,1940 12700,1940 12725,1940 12750,1940 12775,1940 12800,1940 12825,1940 12850,1940 12875,1940 12900,1940 12925,1940 12950,1940 12975,1940 13000,1940 13025,1940 13050,1940 13075,1940 13100,1940 13125,1940 13150,1940 13175,1940 13200,1940 13225,1940 13250,1940 13275,1940 13300,1940 13325,1940 13350,1940 13375,1940 13400,1940 13425,1940 13450,1940 13475,1940 2558,2900 4358,2900 6158,2900 7958,2900 9758,2900 11558,2900 13358,2900 2558,2920 4358,2920 6158,2920 7958,2920 9758,2920 11558,2920 13358,2920 2558,2940 4358,2940 6158,2940 7958,2940 9758,2940 11558,2940 13358,2940 2558,2960 4358,2960 6158,2960 7958,2960 9758,2960 11558,2960 13358,2960 2558,2980 4358,2980 6158,2980 7958,2980 9758,2980 11558,2980 13358,2980 2558,3000 4358,3000 6158,3000 7958,3000 9758,3000 11558,3000 13358,3000 2558,3020 2657.76,3020 4358,3020 4457.76,3020 6158,3020 6257.76,3020 7958,3020 8057.76,3020 9758,3020 9857.76,3020 11558,3020 11657.76,3020 13358,3020 13457.76,3020 2558,3040 2657.76,3040 4358,3040 4457.76,3040 6158,3040 6257.76,3040 7958,3040 8057.76,3040 9758,3040 9857.76,3040 11558,3040 11657.76,3040 13358,3040 13457.76,3040 2558,3060 2657.76,3060 4358,3060 4457.76,3060 6158,3060 6257.76,3060 7958,3060 8057.76,3060 9758,3060 9857.76,3060 11558,3060 11657.76,3060 13358,3060 13457.76,3060 2558,3080 2657.76,3080 4358,3080 4457.76,3080 6158,3080 6257.76,3080 7958,3080 8057.76,3080 9758,3080 9857.76,3080 11558,3080 11657.76,3080 13358,3080 13457.76,3080 2558,3100 2657.76,3100 4358,3100 4457.76,3100 6158,3100 6257.76,3100 7958,3100 8057.76,3100 9758,3100 9857.76,3100 11558,3100 11657.76,3100 13358,3100 13457.76,3100 2558,3120 2657.76,3120 4358,3120 4457.76,3120 6158,3120 6257.76,3120 7958,3120 8057.76,3120 9758,3120 9857.76,3120 11558,3120 11657.76,3120 13358,3120 13457.76,3120 2558,3140 2657.76,3140 4358,3140 4457.76,3140 6158,3140 6257.76,3140 7958,3140 8057.76,3140 9758,3140 9857.76,3140 11558,3140 11657.76,3140 13358,3140 13457.76,3140 2558,3160 2657.76,3160 4358,3160 4457.76,3160 6158,3160 6257.76,3160 7958,3160 8057.76,3160 9758,3160 9857.76,3160 11558,3160 11657.76,3160 13358,3160 13457.76,3160 2558,3180 2657.76,3180 4358,3180 4457.76,3180 6158,3180 6257.76,3180 7958,3180 8057.76,3180 9758,3180 9857.76,3180 11558,3180 11657.76,3180 13358,3180 13457.76,3180 2558,3200 2657.76,3200 4358,3200 4457.76,3200 6158,3200 6257.76,3200 7958,3200 8057.76,3200 9758,3200 9857.76,3200 11558,3200 11657.76,3200 13358,3200 13457.76,3200 2558,3220 2657.76,3220 4358,3220 4457.76,3220 6158,3220 6257.76,3220 7958,3220 8057.76,3220 9758,3220 9857.76,3220 11558,3220 11657.76,3220 13358,3220 13457.76,3220 2558,3240 4358,3240 6158,3240 7958,3240 9758,3240 11558,3240 13358,3240 2660.28,3242.2 4460.27,3242.2 6260.27,3242.2 8060.27,3242.2 9860.27,3242.2 11660.27,3242.2 2558,3260 4358,3260 6158,3260 7958,3260 9758,3260 11558,3260 13358,3260 2642,3275 4442,3275 6242,3275 8042,3275 9842,3275 11642,3275 13442,3275 2558,3280 4358,3280 6158,3280 7958,3280 9758,3280 11558,3280 13358,3280 2642,3295 4442,3295 6242,3295 8042,3295 9842,3295 11642,3295 13442,3295 2558,3315 2642,3315 4358,3315 4442,3315 6158,3315 6242,3315 7958,3315 8042,3315 9758,3315 9842,3315 11558,3315 11642,3315 13358,3315 13442,3315 2558,3335 2642,3335 4358,3335 4442,3335 6158,3335 6242,3335 7958,3335 8042,3335 9758,3335 9842,3335 11558,3335 11642,3335 13358,3335 13442,3335 2558,3355 2642,3355 4358,3355 4442,3355 6158,3355 6242,3355 7958,3355 8042,3355 9758,3355 9842,3355 11558,3355 11642,3355 13358,3355 13442,3355 2558,3375 2642,3375 4358,3375 4442,3375 6158,3375 6242,3375 7958,3375 8042,3375 9758,3375 9842,3375 11558,3375 11642,3375 13358,3375 13442,3375 2558,3395 2642,3395 4358,3395 4442,3395 6158,3395 6242,3395 7958,3395 8042,3395 9758,3395 9842,3395 11558,3395 11642,3395 13358,3395 13442,3395 2558,3415 2642,3415 4358,3415 4442,3415 6158,3415 6242,3415 7958,3415 8042,3415 9758,3415 9842,3415 11558,3415 11642,3415 13358,3415 13442,3415 2558,3435 2642,3435 4358,3435 4442,3435 6158,3435 6242,3435 7958,3435 8042,3435 9758,3435 9842,3435 11558,3435 11642,3435 13358,3435 13442,3435 2558,3455 2642,3455 4358,3455 4442,3455 6158,3455 6242,3455 7958,3455 8042,3455 9758,3455 9842,3455 11558,3455 11642,3455 13358,3455 13442,3455 2556.7,3475 2643.3,3475 4356.7,3475 4443.3,3475 6156.7,3475 6243.3,3475 7956.7,3475 8043.3,3475 9756.7,3475 9843.3,3475 11556.7,3475 11643.3,3475 13356.7,3475 13443.3,3475 2550.76,3491.32 2649.24,3491.32 4350.76,3491.32 4449.24,3491.32 6150.76,3491.32 6249.24,3491.32 7950.76,3491.32 8049.24,3491.32 9750.76,3491.32 9849.24,3491.32 11550.76,3491.32 11649.24,3491.32 13350.76,3491.32 13449.24,3491.32 2550.76,3508.68 2649.24,3508.68 4350.76,3508.68 4449.24,3508.68 6150.76,3508.68 6249.24,3508.68 7950.76,3508.68 8049.24,3508.68 9750.76,3508.68 9849.24,3508.68 11550.76,3508.68 11649.24,3508.68 13350.76,3508.68 13449.24,3508.68 2556.7,3525 2643.3,3525 4356.7,3525 4443.3,3525 6156.7,3525 6243.3,3525 7956.7,3525 8043.3,3525 9756.7,3525 9843.3,3525 11556.7,3525 11643.3,3525 13356.7,3525 13443.3,3525 2567.86,3538.3 2632.14,3538.3 4367.86,3538.3 4432.14,3538.3 6167.86,3538.3 6232.14,3538.3 7967.86,3538.3 8032.14,3538.3 9767.86,3538.3 9832.14,3538.3 11567.86,3538.3 11632.14,3538.3 13367.86,3538.3 13432.14,3538.3 2582.9,3546.98 2617.1,3546.98 4382.9,3546.98 4417.1,3546.98 6182.9,3546.98 6217.1,3546.98 7982.9,3546.98 8017.1,3546.98 9782.9,3546.98 9817.1,3546.98 11582.9,3546.98 11617.1,3546.98 13382.9,3546.98 13417.1,3546.98 2600,3550 4400,3550 6200,3550 8000,3550 9800,3550 11600,3550 13400,3550 2525,3675 2550,3675 2725,3675 2750,3675 2775,3675 2800,3675 2825,3675 2850,3675 2875,3675 2900,3675 2925,3675 2950,3675 2975,3675 3000,3675 3025,3675 3050,3675 3075,3675 3100,3675 3125,3675 3150,3675 3175,3675 3200,3675 3225,3675 3250,3675 3275,3675 3300,3675 3325,3675 3350,3675 3375,3675 3400,3675 3425,3675 3450,3675 3475,3675 3500,3675 3525,3675 3550,3675 3575,3675 3600,3675 3625,3675 3650,3675 3675,3675 3700,3675 3725,3675 3750,3675 3775,3675 3800,3675 3825,3675 3850,3675 3875,3675 3900,3675 3925,3675 3950,3675 3975,3675 4000,3675 4025,3675 4050,3675 4075,3675 4100,3675 4125,3675 4150,3675 4175,3675 4200,3675 4225,3675 4250,3675 4275,3675 4450,3675 4475,3675 6125,3675 6150,3675 6325,3675 6350,3675 6375,3675 6400,3675 6425,3675 6450,3675 6475,3675 6500,3675 6525,3675 6550,3675 6575,3675 6600,3675 6625,3675 6650,3675 6675,3675 6700,3675 6725,3675 6750,3675 6775,3675 6800,3675 6825,3675 6850,3675 6875,3675 6900,3675 6925,3675 6950,3675 6975,3675 7000,3675 7025,3675 7050,3675 7075,3675 7100,3675 7125,3675 7150,3675 7175,3675 7200,3675 7225,3675 7250,3675 7275,3675 7300,3675 7325,3675 7350,3675 7375,3675 7400,3675 7425,3675 7450,3675 7475,3675 7500,3675 7525,3675 7550,3675 7575,3675 7600,3675 7625,3675 7650,3675 7675,3675 7700,3675 7725,3675 7750,3675 7775,3675 7800,3675 7825,3675 7850,3675 7875,3675 8050,3675 8075,3675 9725,3675 9750,3675 9925,3675 9950,3675 9975,3675 10000,3675 10025,3675 10050,3675 10075,3675 10100,3675 10125,3675 10150,3675 10175,3675 10200,3675 10225,3675 10250,3675 10275,3675 10300,3675 10325,3675 10350,3675 10375,3675 10400,3675 10425,3675 10450,3675 10475,3675 10500,3675 10525,3675 10550,3675 10575,3675 10600,3675 10625,3675 10650,3675 10675,3675 10700,3675 10725,3675 10750,3675 10775,3675 10800,3675 10825,3675 10850,3675 10875,3675 10900,3675 10925,3675 10950,3675 10975,3675 11000,3675 11025,3675 11050,3675 11075,3675 11100,3675 11125,3675 11150,3675 11175,3675 11200,3675 11225,3675 11250,3675 11275,3675 11300,3675 11325,3675 11350,3675 11375,3675 11400,3675 11425,3675 11450,3675 11475,3675 11650,3675 11675,3675 13325,3675 13350,3675 13525,3675 13550,3675 13575,3675 13600,3675 13625,3675 13650,3675 13675,3675 13700,3675 13725,3675 13750,3675 13775,3675 13800,3675 13825,3675 13850,3675 13875,3675 13900,3675 13925,3675 13950,3675 13975,3675 14000,3675 14025,3675 14050,3675 14075,3675 14100,3675 14125,3675 14150,3675 14175,3675 14200,3675 14225,3675 14250,3675 14275,3675 14300,3675 14325,3675 14350,3675 14375,3675 14400,3675 14425,3675 14450,3675 14475,3675 14500,3675 14525,3675 14550,3675 14575,3675 14600,3675 14625,3675 14650,3675 14675,3675 14700,3675 14725,3675 14750,3675 14775,3675 14800,3675 14825,3675 14850,3675 14875,3675 14900,3675 14925,3675 14950,3675 14975,3675 15000,3675 15025,3675 15050,3675 15075,3675 15250,3675 15275,3675 2525,3700 2550,3700 2650,3700 2675,3700 2700,3700 2725,3700 2750,3700 2775,3700 2800,3700 2825,3700 2850,3700 2875,3700 2900,3700 2925,3700 2950,3700 2975,3700 3000,3700 3025,3700 3050,3700 3075,3700 3100,3700 3125,3700 3150,3700 3175,3700 3200,3700 3225,3700 3250,3700 3275,3700 3300,3700 3325,3700 3350,3700 3375,3700 3400,3700 3425,3700 3450,3700 3475,3700 3500,3700 3525,3700 3550,3700 3575,3700 3600,3700 3625,3700 3650,3700 3675,3700 3700,3700 3725,3700 3750,3700 3775,3700 3800,3700 3825,3700 3850,3700 3875,3700 3900,3700 3925,3700 3950,3700 3975,3700 4000,3700 4025,3700 4050,3700 4075,3700 4100,3700 4125,3700 4150,3700 4175,3700 4200,3700 4225,3700 4250,3700 4275,3700 4300,3700 4325,3700 4350,3700 4450,3700 4475,3700 6125,3700 6150,3700 6250,3700 6275,3700 6300,3700 6325,3700 6350,3700 6375,3700 6400,3700 6425,3700 6450,3700 6475,3700 6500,3700 6525,3700 6550,3700 6575,3700 6600,3700 6625,3700 6650,3700 6675,3700 6700,3700 6725,3700 6750,3700 6775,3700 6800,3700 6825,3700 6850,3700 6875,3700 6900,3700 6925,3700 6950,3700 6975,3700 7000,3700 7025,3700 7050,3700 7075,3700 7100,3700 7125,3700 7150,3700 7175,3700 7200,3700 7225,3700 7250,3700 7275,3700 7300,3700 7325,3700 7350,3700 7375,3700 7400,3700 7425,3700 7450,3700 7475,3700 7500,3700 7525,3700 7550,3700 7575,3700 7600,3700 7625,3700 7650,3700 7675,3700 7700,3700 7725,3700 7750,3700 7775,3700 7800,3700 7825,3700 7850,3700 7875,3700 7900,3700 7925,3700 7950,3700 8050,3700 8075,3700 9725,3700 9750,3700 9850,3700 9875,3700 9900,3700 9925,3700 9950,3700 9975,3700 10000,3700 10025,3700 10050,3700 10075,3700 10100,3700 10125,3700 10150,3700 10175,3700 10200,3700 10225,3700 10250,3700 10275,3700 10300,3700 10325,3700 10350,3700 10375,3700 10400,3700 10425,3700 10450,3700 10475,3700 10500,3700 10525,3700 10550,3700 10575,3700 10600,3700 10625,3700 10650,3700 10675,3700 10700,3700 10725,3700 10750,3700 10775,3700 10800,3700 10825,3700 10850,3700 10875,3700 10900,3700 10925,3700 10950,3700 10975,3700 11000,3700 11025,3700 11050,3700 11075,3700 11100,3700 11125,3700 11150,3700 11175,3700 11200,3700 11225,3700 11250,3700 11275,3700 11300,3700 11325,3700 11350,3700 11375,3700 11400,3700 11425,3700 11450,3700 11475,3700 11500,3700 11525,3700 11550,3700 11650,3700 11675,3700 13325,3700 13350,3700 13450,3700 13475,3700 13500,3700 13525,3700 13550,3700 13575,3700 13600,3700 13625,3700 13650,3700 13675,3700 13700,3700 13725,3700 13750,3700 13775,3700 13800,3700 13825,3700 13850,3700 13875,3700 13900,3700 13925,3700 13950,3700 13975,3700 14000,3700 14025,3700 14050,3700 14075,3700 14100,3700 14125,3700 14150,3700 14175,3700 14200,3700 14225,3700 14250,3700 14275,3700 14300,3700 14325,3700 14350,3700 14375,3700 14400,3700 14425,3700 14450,3700 14475,3700 14500,3700 14525,3700 14550,3700 14575,3700 14600,3700 14625,3700 14650,3700 14675,3700 14700,3700 14725,3700 14750,3700 14775,3700 14800,3700 14825,3700 14850,3700 14875,3700 14900,3700 14925,3700 14950,3700 14975,3700 15000,3700 15025,3700 15050,3700 15075,3700 15100,3700 15125,3700 15150,3700 15250,3700 15275,3700 2525,3725 2550,3725 4450,3725 4475,3725 6125,3725 6150,3725 8050,3725 8075,3725 9725,3725 9750,3725 11650,3725 11675,3725 13325,3725 13350,3725 15250,3725 15275,3725 2525,3750 2550,3750 4450,3750 4475,3750 6125,3750 6150,3750 8050,3750 8075,3750 9725,3750 9750,3750 11650,3750 11675,3750 13325,3750 13350,3750 15250,3750 15275,3750 2525,3775 2550,3775 4450,3775 4475,3775 6125,3775 6150,3775 8050,3775 8075,3775 9725,3775 9750,3775 11650,3775 11675,3775 13325,3775 13350,3775 15250,3775 15275,3775 2525,3800 2550,3800 2575,3800 4425,3800 4450,3800 4475,3800 6125,3800 6150,3800 6175,3800 8025,3800 8050,3800 8075,3800 9725,3800 9750,3800 9775,3800 11625,3800 11650,3800 11675,3800 13325,3800 13350,3800 13375,3800 15225,3800 15250,3800 15275,3800 2525,3825 2550,3825 2575,3825 2600,3825 4400,3825 4425,3825 4450,3825 4475,3825 6125,3825 6150,3825 6175,3825 6200,3825 8000,3825 8025,3825 8050,3825 8075,3825 9725,3825 9750,3825 9775,3825 9800,3825 11600,3825 11625,3825 11650,3825 11675,3825 13325,3825 13350,3825 13375,3825 13400,3825 15200,3825 15225,3825 15250,3825 15275,3825 2525,3850 2550,3850 2575,3850 2600,3850 4400,3850 4425,3850 4450,3850 4475,3850 6125,3850 6150,3850 6175,3850 6200,3850 8000,3850 8025,3850 8050,3850 8075,3850 9725,3850 9750,3850 9775,3850 9800,3850 11600,3850 11625,3850 11650,3850 11675,3850 13325,3850 13350,3850 13375,3850 13400,3850 15200,3850 15225,3850 15250,3850 15275,3850 2525,3875 2550,3875 2575,3875 2600,3875 4400,3875 4425,3875 4450,3875 4475,3875 6125,3875 6150,3875 6175,3875 6200,3875 8000,3875 8025,3875 8050,3875 8075,3875 9725,3875 9750,3875 9775,3875 9800,3875 11600,3875 11625,3875 11650,3875 11675,3875 13325,3875 13350,3875 13375,3875 13400,3875 15200,3875 15225,3875 15250,3875 15275,3875 2525,3900 2550,3900 2575,3900 2600,3900 4400,3900 4425,3900 4450,3900 4475,3900 6125,3900 6150,3900 6175,3900 6200,3900 8000,3900 8025,3900 8050,3900 8075,3900 9725,3900 9750,3900 9775,3900 9800,3900 11600,3900 11625,3900 11650,3900 11675,3900 13325,3900 13350,3900 13375,3900 13400,3900 15200,3900 15225,3900 15250,3900 15275,3900 2525,3925 2550,3925 2575,3925 2600,3925 4400,3925 4425,3925 4450,3925 4475,3925 6125,3925 6150,3925 6175,3925 6200,3925 8000,3925 8025,3925 8050,3925 8075,3925 9725,3925 9750,3925 9775,3925 9800,3925 11600,3925 11625,3925 11650,3925 11675,3925 13325,3925 13350,3925 13375,3925 13400,3925 15200,3925 15225,3925 15250,3925 15275,3925 2525,3950 2550,3950 2575,3950 2600,3950 4400,3950 4425,3950 4450,3950 4475,3950 6125,3950 6150,3950 6175,3950 6200,3950 8000,3950 8025,3950 8050,3950 8075,3950 9725,3950 9750,3950 9775,3950 9800,3950 11600,3950 11625,3950 11650,3950 11675,3950 13325,3950 13350,3950 13375,3950 13400,3950 15200,3950 15225,3950 15250,3950 15275,3950 2525,3975 2550,3975 2575,3975 2600,3975 2625,3975 2650,3975 2675,3975 2700,3975 2725,3975 2750,3975 2775,3975 2800,3975 2825,3975 2850,3975 2875,3975 2900,3975 2925,3975 2950,3975 2975,3975 3000,3975 3025,3975 3050,3975 3075,3975 3100,3975 3125,3975 3150,3975 3175,3975 3200,3975 3225,3975 3250,3975 3275,3975 3300,3975 3325,3975 3350,3975 3375,3975 3400,3975 3425,3975 3450,3975 3550,3975 3575,3975 3600,3975 3625,3975 3650,3975 3675,3975 3700,3975 3725,3975 3750,3975 3775,3975 3800,3975 3825,3975 3850,3975 3875,3975 3900,3975 3925,3975 3950,3975 3975,3975 4000,3975 4025,3975 4050,3975 4075,3975 4100,3975 4125,3975 4150,3975 4175,3975 4200,3975 4225,3975 4250,3975 4275,3975 4300,3975 4325,3975 4350,3975 4375,3975 4400,3975 4425,3975 4450,3975 4475,3975 6125,3975 6150,3975 6175,3975 6200,3975 6225,3975 6250,3975 6275,3975 6300,3975 6325,3975 6350,3975 6375,3975 6400,3975 6425,3975 6450,3975 6475,3975 6500,3975 6525,3975 6550,3975 6575,3975 6600,3975 6625,3975 6650,3975 6675,3975 6700,3975 6725,3975 6750,3975 6775,3975 6800,3975 6825,3975 6850,3975 6875,3975 6900,3975 6925,3975 6950,3975 6975,3975 7000,3975 7025,3975 7050,3975 7150,3975 7175,3975 7200,3975 7225,3975 7250,3975 7275,3975 7300,3975 7325,3975 7350,3975 7375,3975 7400,3975 7425,3975 7450,3975 7475,3975 7500,3975 7525,3975 7550,3975 7575,3975 7600,3975 7625,3975 7650,3975 7675,3975 7700,3975 7725,3975 7750,3975 7775,3975 7800,3975 7825,3975 7850,3975 7875,3975 7900,3975 7925,3975 7950,3975 7975,3975 8000,3975 8025,3975 8050,3975 8075,3975 9725,3975 9750,3975 9775,3975 9800,3975 9825,3975 9850,3975 9875,3975 9900,3975 9925,3975 9950,3975 9975,3975 10000,3975 10025,3975 10050,3975 10075,3975 10100,3975 10125,3975 10150,3975 10175,3975 10200,3975 10225,3975 10250,3975 10275,3975 10300,3975 10325,3975 10350,3975 10375,3975 10400,3975 10425,3975 10450,3975 10475,3975 10500,3975 10525,3975 10550,3975 10575,3975 10600,3975 10625,3975 10650,3975 10750,3975 10775,3975 10800,3975 10825,3975 10850,3975 10875,3975 10900,3975 10925,3975 10950,3975 10975,3975 11000,3975 11025,3975 11050,3975 11075,3975 11100,3975 11125,3975 11150,3975 11175,3975 11200,3975 11225,3975 11250,3975 11275,3975 11300,3975 11325,3975 11350,3975 11375,3975 11400,3975 11425,3975 11450,3975 11475,3975 11500,3975 11525,3975 11550,3975 11575,3975 11600,3975 11625,3975 11650,3975 11675,3975 13325,3975 13350,3975 13375,3975 13400,3975 13425,3975 13450,3975 13475,3975 13500,3975 13525,3975 13550,3975 13575,3975 13600,3975 13625,3975 13650,3975 13675,3975 13700,3975 13725,3975 13750,3975 13775,3975 13800,3975 13825,3975 13850,3975 13875,3975 13900,3975 13925,3975 13950,3975 13975,3975 14000,3975 14025,3975 14050,3975 14075,3975 14100,3975 14125,3975 14150,3975 14175,3975 14200,3975 14225,3975 14250,3975 14350,3975 14375,3975 14400,3975 14425,3975 14450,3975 14475,3975 14500,3975 14525,3975 14550,3975 14575,3975 14600,3975 14625,3975 14650,3975 14675,3975 14700,3975 14725,3975 14750,3975 14775,3975 14800,3975 14825,3975 14850,3975 14875,3975 14900,3975 14925,3975 14950,3975 14975,3975 15000,3975 15025,3975 15050,3975 15075,3975 15100,3975 15125,3975 15150,3975 15175,3975 15200,3975 15225,3975 15250,3975 15275,3975